# Altium PCB PSU.PcbDoc
Units mm, origin at the board's own origin, x right, y up, seen from the top; angles counter-clockwise.
Board outline 114.9 x 65.48 mm, 2 copper layers (Top Layer, Bottom Layer); 15 components, 12 nets, 58 pads, 0 vias.
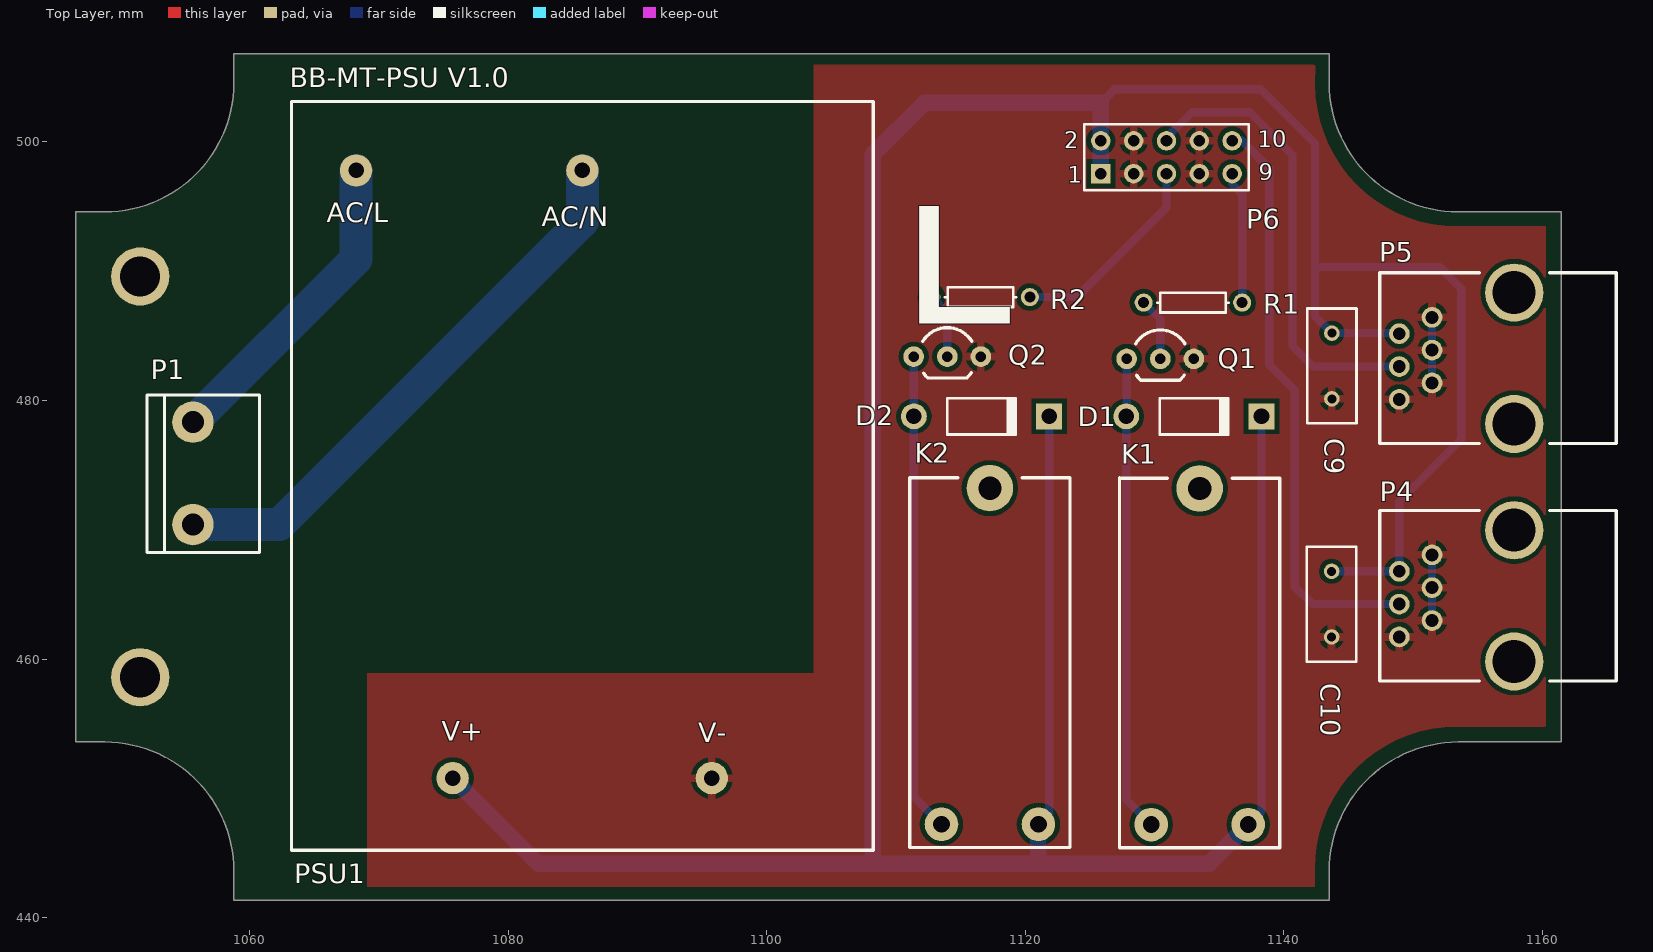
[diagram p0: Top Layer view]
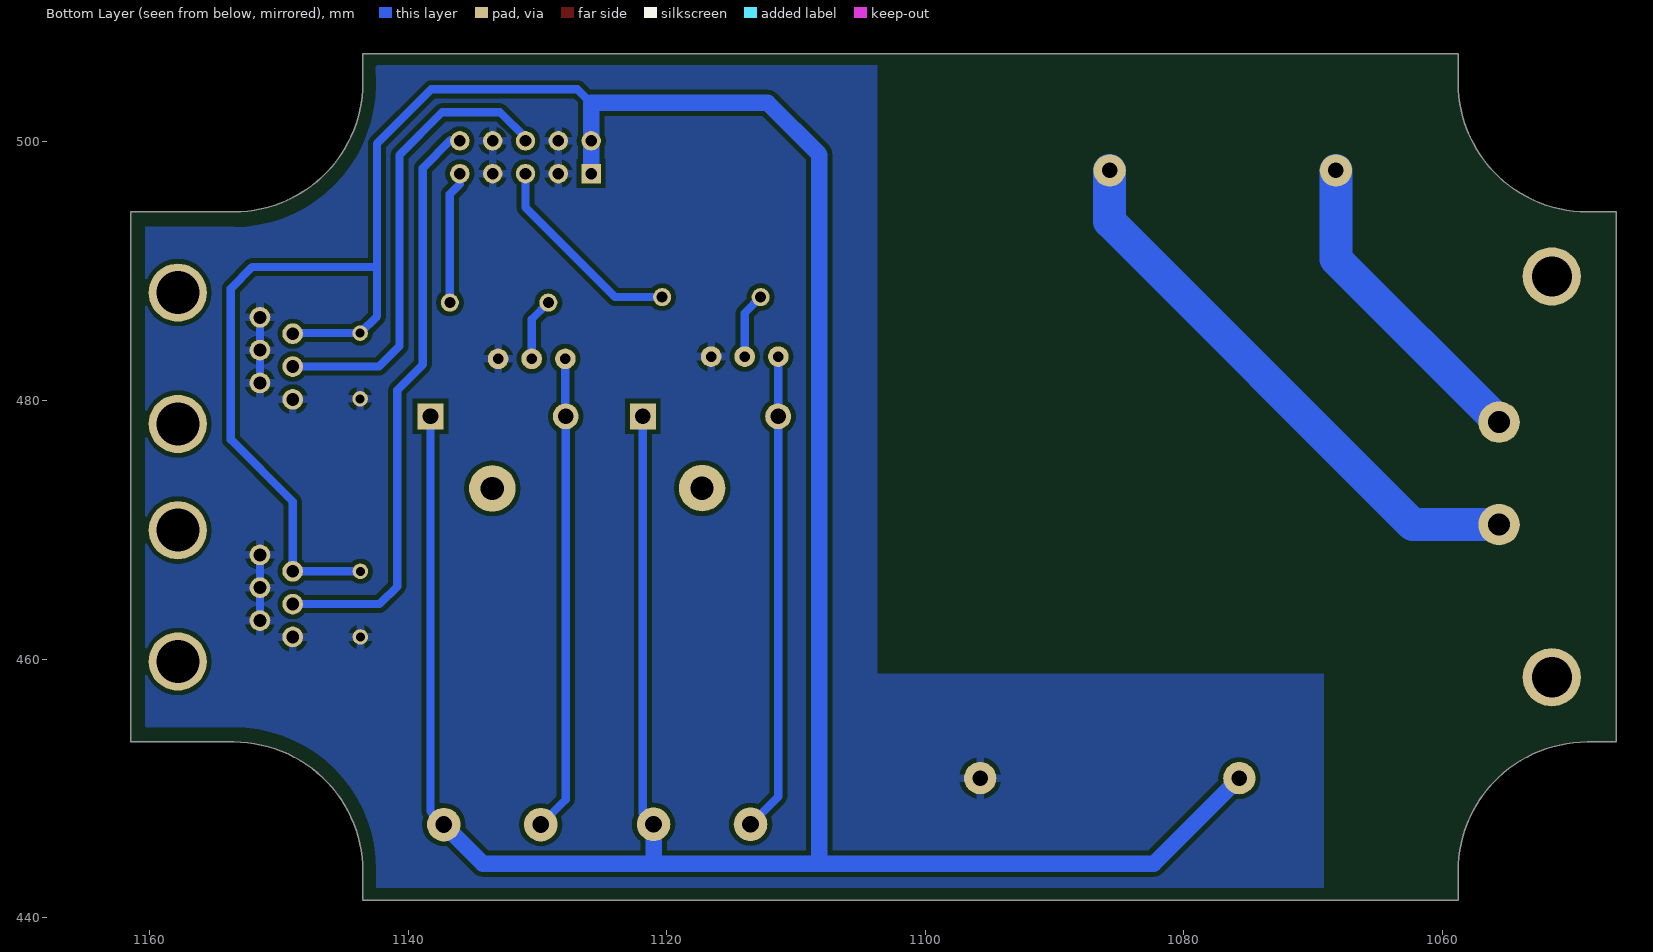
[diagram p1: Bottom Layer view, seen from below]

## Layer stack, top to bottom
Top Layer: signal copper 0.0356
Dielectric: prepreg 0.32, FR-4, Dk 4.8
Bottom Layer: signal copper 0.0356

## Board outline
1058.799,441.35 1058.799,443.59 ccw(c1048.799,443.59) 1048.799,453.59 1046.559,453.59 1046.559,494.59 1048.799,494.59 ccw(c1048.799,504.59) 1058.799,504.59 1058.799,506.83 1143.509,506.83 1143.509,504.59 ccw(c1153.509,504.59) 1153.509,494.59 1161.459,494.59 1161.459,453.59 1153.509,453.59 ccw(c1153.509,443.59) 1143.509,443.59 1143.509,441.35

## Design rules (kind name [scope] priority, off if disabled: settings)
Clearance [All] p1: gap=0.356
Height [All] p1: minheight=0 maxheight=76.2 prefheight=12.7
HoleSize [All] p1: absolutevalues=TRUE maxlimit=6.35 minlimit=0.254 maxpercent=80.000 minpercent=20.000
MinimumAnnularRing [All] p1: minimumring=0.152
MinimumSolderMaskSliver [All] p1: minsoldermaskwidth=0.076
PolygonConnect [All] p1: connectstyle=Relief reliefconductorwidth=0.635 reliefentries=4 polygonreliefangle="90 Angle"
RoutingVias [All] p1: holewidth=0.711 width=1.27 viastyle="Through Hole" minholewidth=0.711 minwidth=1.27 maxholewidth=0.711 maxwidth=1.27
SilkscreenOverComponentPads [All] p1: minsilkscreentomaskgap=0.229
SolderMaskExpansion [All] p1: expansion=0.102
Width [All] p1: maxlimit=6.35 minlimit=0.254 preferedwidth=0.254
24 further rules are at their usual default settings.

## Components (designator, comment, footprint, x,y, rotation, side; value= is the part's Value field where it differs from the comment)
C9 "Cap" RAD-0.2 1143.725,482.675 r90 top
C10 "Cap" RAD-0.2 1143.7,464.255 r90 top
D1 "Diode 1N4007" DO-41 1133.05,478.775 r0 top
D2 "Diode 1N4007" DO-41 1116.625,478.775 r0 top
K1 "RELAY_1" ALE12XXX 1133.5,447.2 r90 top
K2 "RELAY_2" ALE12XXX 1117.275,447.225 r90 top
P1 "AC_IN" "2POS 0.312\" HEADER" 1055.625,478.325 r90 top
P4 "ONEWIRE_1" "CONN MOD JACK R/A 6P6C" 1157.825,469.975 r0 top locked
P5 "ONEWIRE_2" "CONN MOD JACK R/A 6P6C" 1157.825,488.35 r0 top locked
P6 "MAIN_BRD" HDR2X5 1125.85,497.55 r0 top
PSU1 "NFM-05-5" NFM-05-5 1063.25,503.125 r270 top locked
Q1 "NPN" "TO-92 BENT LEAD" 1130.45,483.225 r180 top
Q2 "NPN" "TO-92 BENT LEAD" 1113.975,483.4 r180 top
R1 "Res1" AXIAL-0.3 1132.975,487.575 r180 top
R2 "Res1" AXIAL-0.3 1116.55,488 r180 top

## Footprints (in the part's own frame and the unit in brackets; to place one, negate y for a bottom-side part, rotate by r counter-clockwise, add the part's x,y. Pads: shape width x height; smd on the part's side, far side on the other; paste and mask are expansions set on the pad)
"2POS 0.312\" HEADER" [mm] "CONN HEADER .312 VERT 2POS TIN"
  round 3.2 hole 1.7: 1(-7.92,0) 2(0,0)
  silkscreen extent -10.07,-5.15 2.1,3.55
ALE12XXX [mm] "Power Relay"
  round 2.6 hole 1.3: 1(0,-3.75) 2(0,3.75)
  round 3.6 hole 1.8: ""(26,0)
  silkscreen extent -1.8,-6.2 26.83,6.2
AXIAL-0.3 [mm] "Axial Device, Thru-Hole; 2 Leads; 0.3 in Pin Spacing"
  round 1.4 hole 0.85: 1(-3.81,0) 2(3.81,0)
  silkscreen extent -2.77,-0.76 2.77,0.76
"CONN MOD JACK R/A 6P6C" [mm] "RJ11 Jack"
  round 1.6 hole 1: 1(-8.89,-8.26) 2(-6.35,-6.99) 3(-8.89,-5.72) 4(-6.35,-4.45) 5(-8.89,-3.18) 6(-6.35,-1.91)
  round 4.5 hole 3.33: ""(0,-10.16) ""(0,0)
  silkscreen extent -10.4,-11.68 7.9,1.53
DO-41 [mm] "Diode, Axial; Body 5.2 x 2.7 mm (LxDia. max), Lead Dia. 0.86 mm (max)"
  round 2 hole 1.2: 1(-5.23,0)
  rect 2x2 hole 1.2: 2(5.23,0)
  silkscreen extent -2.65,-1.4 2.75,1.4
HDR2X5 [mm] "Connector; Header; 5x2 Position"
  rect 1.5x1.5 hole 0.9: 1(0,0)
  round 1.5 hole 0.9: 2(0,2.54) 3(2.54,0) 4(2.54,2.54) 5(5.08,0) 6(5.08,2.54) 7(7.62,0) 8(7.62,2.54) 9(10.16,0) 10(10.16,2.54)
  silkscreen extent -1.27,-1.27 11.43,3.81
NFM-05-5 [mm] "5V 5W AC/DC power supply"
  round 2.5 hole 1.2: 1(5.33,5) 2(5.33,22.5) 3(52.33,12.47) 4(52.33,32.51)
  silkscreen extent 0,0 57.9,45
RAD-0.2 [mm] "Radial Cap, Thru-Hole; 2 Leads; 0.2 in Pin Spacing"
  round 1.2 hole 0.7: 1(-2.54,0) 2(2.54,0)
  silkscreen extent -4.44,-1.91 4.44,1.91
"TO-92 BENT LEAD" [mm] "TO-92 0.2 LEAD SPACING"
  round 1.6 hole 0.8: 1(2.6,0) 2(0,0) 3(-2.6,0)
  silkscreen extent -1.9,-2.24 1.9,1.66

## Part data
C9 C10: "Capacitor"
D1 D2: "1 Amp General Purpose Rectifier"
K1 K2 P1: library part "Header 2", "Header, 2-Pin"
P4 P5: library part "Header 6", "Header, 6-Pin"
P6: library part "Header 5X2", "Header, 5-Pin, Dual row"
PSU1: "5V 5W AC/DC Power Supply"
Q1 Q2: "NPN Bipolar Transistor"
R1 R2: "Resistor"

## Free pads (board coordinates)
  round 4.5 hole 3.1: ""(1051.55,458.6) ""(1051.55,489.6)

## Nets (pads, with @x,y where several pads share a name; then routed paths per layer and width w, separated by ;. In a path a pad name is that pad's centre, name@x,y a point inside that pad or via, vN(x,y) a via of type N, cw(c..) or ccw(c..) an arc to the next point about the centre after c; other vN are vias at no path point)
5V: C9.2 C10.2 D1.2 D2.2 K1.1 K2.1 P4.5 P5.5 P6.1 P6.2 PSU1.3 | length 292.2
  Bottom Layer w0.635: K2.1 1121.855,448.055 D2.2 ; 1125.85,503.025 1126.9,504.075 1138.225,504.075 1142.425,499.875 1142.425,490.325 ; K1.1 1138.28,448.23 D1.2 ; C10.2 P4.5 1148.935,472.185 1153.725,476.975 1153.725,488.675 1152.075,490.325 1142.425,490.325 ; P5.5@1148.89,485.215 C9.2 1142.425,486.515 1142.425,490.325
  Bottom Layer w1.27: PSU1.3 1082.34,444.175 1108.2,444.175 ; 1121.025,444.225 K2.1 ; P6.1 1125.85,503.025 1112.2,503.025 1108.2,499.025 1108.2,444.175 ; K1.1 1134.225,444.175 1108.2,444.175
GND: C9.1 C10.1 P4.1 P4.2 P4.4 P4.6 P5.1 P5.2 P5.4 P5.6 P6.3 P6.4 P6.7 P6.8 PSU1.4 Q1.3 Q2.3 | length 10.2
  Bottom Layer w0.635: P4.2 P4.4 P4.6 ; P5.2 P5.4 P5.6
NetD1_1: D1.1 K1.2 Q1.1 | length 36.8
  Bottom Layer w0.635: D1.1 1127.82,449.13 K1.2 ; D1.1@1127.85,478.805 Q1.1
NetD2_1: D2.1 K2.2 Q2.1 | length 37.1
  Bottom Layer w0.635: Q2.1 1111.375,449.375 K2.2
NetP1_1: P1.1 PSU1.2 | length 43.8
  Bottom Layer w2.54: P1.1 1062.305,470.405 1085.75,493.85 PSU1.2
NetP1_2: P1.2 PSU1.1 | length 24.7
  Bottom Layer w2.54: P1.2 1068.25,490.95 PSU1.1
NetQ1_2: Q1.2 R1.2 | length 4.9
  Bottom Layer w0.635: R1.2 1130.45,486.29 Q1.2
NetQ2_2: Q2.2 R2.2 | length 5.1
  Bottom Layer w0.635: R2.2 1113.975,486.765 Q2.2
OW1: P4.3 P6.10 | length 44.9
  Bottom Layer w0.635: P6.10@1136.725,500.14 1138.875,497.99 1138.875,482.8 1140.85,480.825 1140.85,465.625 1142.22,464.255 P4.3
OW2: P5.3 P6.6 | length 35.8
  Bottom Layer w0.635: P6.6@1130.93,500.14 1130.93,500.33 1132.9,502.3 1137.375,502.3 1140.675,499 1140.675,484.225 1142.27,482.63 P5.3
R1_CTL: P6.9 R1.1 | length 10.3
  Bottom Layer w0.635: P6.9@1136.01,497.6 1136.01,496.76 1136.785,495.985 R1.1
R2_CTL: P6.5 R2.1 | length 16.1
  Bottom Layer w0.635: R2.1 1124,488 1130.93,494.93 P6.5@1130.93,497.6
pads on no net: K1. K2. P4. P5.

## Polygon pours and split planes (outlines as drawn)
GND on Bottom Layer "Bottom Layer-No Net 1" (solid, pour order 11): 1069.175,442.325 1069.175,458.875 1103.725,458.875 1103.725,505.925 1142.5,505.925 1142.5,504.425 ccw(c1153.5,504.425) 1153.5,493.425 1160.35,493.425 1160.35,454.725 1153.475,454.725 ccw(c1153.475,443.725) 1142.475,443.725 1142.475,442.325
GND on Top Layer "Top Layer-GND" (solid, pour order 11): 1069.1,442.375 1069.1,458.925 1103.65,458.925 1103.65,505.975 1142.425,505.975 1142.425,504.475 ccw(c1153.425,504.475) 1153.425,493.475 1160.275,493.475 1160.275,454.775 1153.4,454.775 ccw(c1153.4,443.775) 1142.4,443.775 1142.4,442.375

## Silkscreen, mask and mechanical layers (free items; w line width, h text height)
Top Overlay:
  region: 1137.025,468.625
  region: 1161.8,442.975
  text "BB-MT-PSU V1.0" at 1063.125,504.25 h1.52
  text "L" at 1110.3,480.625 h27.94
Mechanical 13:
  the board outline again, w0.254
Mechanical 15:
  lines w0.254: 1069.175,442.325 1069.175,458.875 1103.725,458.875 1103.725,505.925 1142.5,505.925 1142.5,504.425 ccw(c1153.5,504.425) 1153.5,493.425 1160.35,493.425 1160.35,454.725 1153.475,454.725 ccw(c1153.475,443.725) 1142.475,443.725 1142.475,442.325 1069.175,442.325

## Text inside footprints (layer, text, board x,y; h text height)
P6: Top Overlay "2" at 1123.025,499.525 h1.27; Top Overlay "1" at 1123.275,496.85 h1.27; Top Overlay "9" at 1138.075,497.05 h1.27; Top Overlay "10" at 1137.975,499.575 h1.27
PSU1: Top Overlay "V+" at 1074.875,453.7 h1.52; Top Overlay "V-" at 1094.725,453.575 h1.52; Top Overlay "AC/L" at 1065.975,493.775 h1.52; Top Overlay "AC/N" at 1082.6,493.5 h1.52